# Altium PCB PCB1.PcbDoc
Units mil, origin at the board's own origin, x right, y up, seen from the top; angles counter-clockwise.
Board outline 6000 x 4000 mil, 2 copper layers (Top Layer, Bottom Layer); 50 components, 22 nets, 166 pads, 2 vias.
Unrouted connection lines stored in the file: 14.
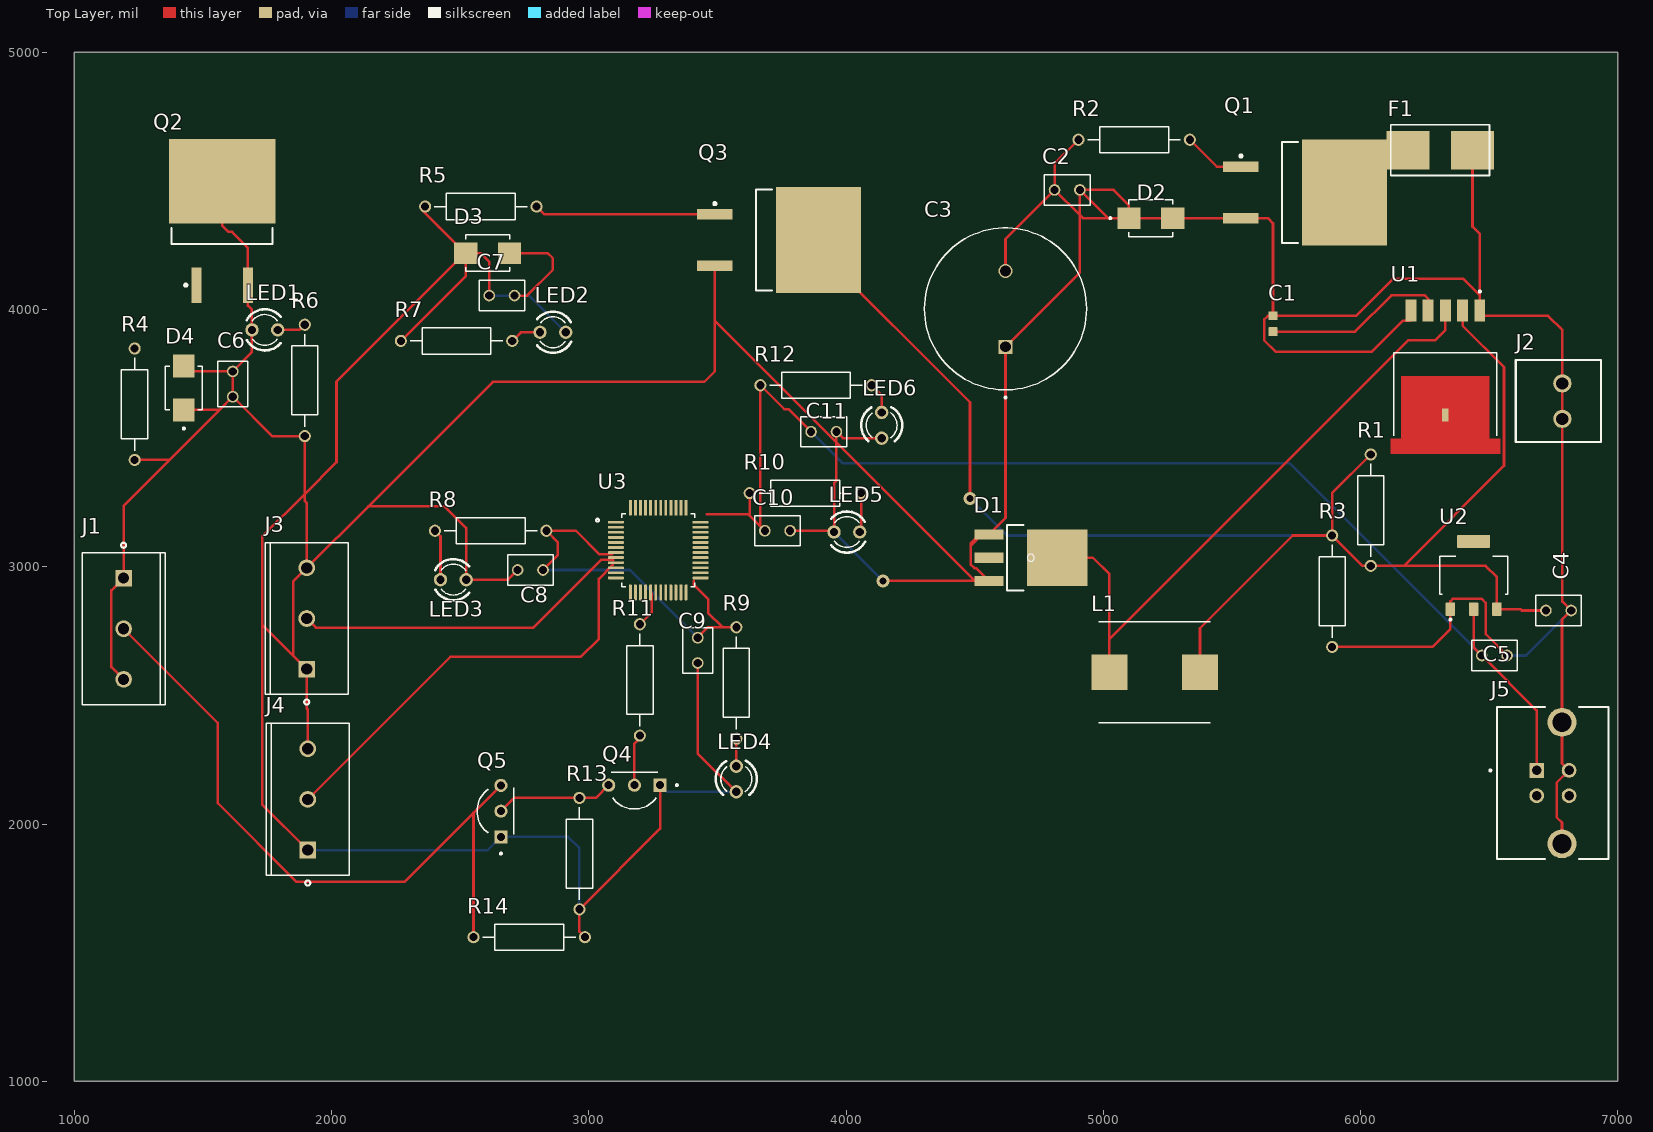
[diagram p0: Top Layer view]
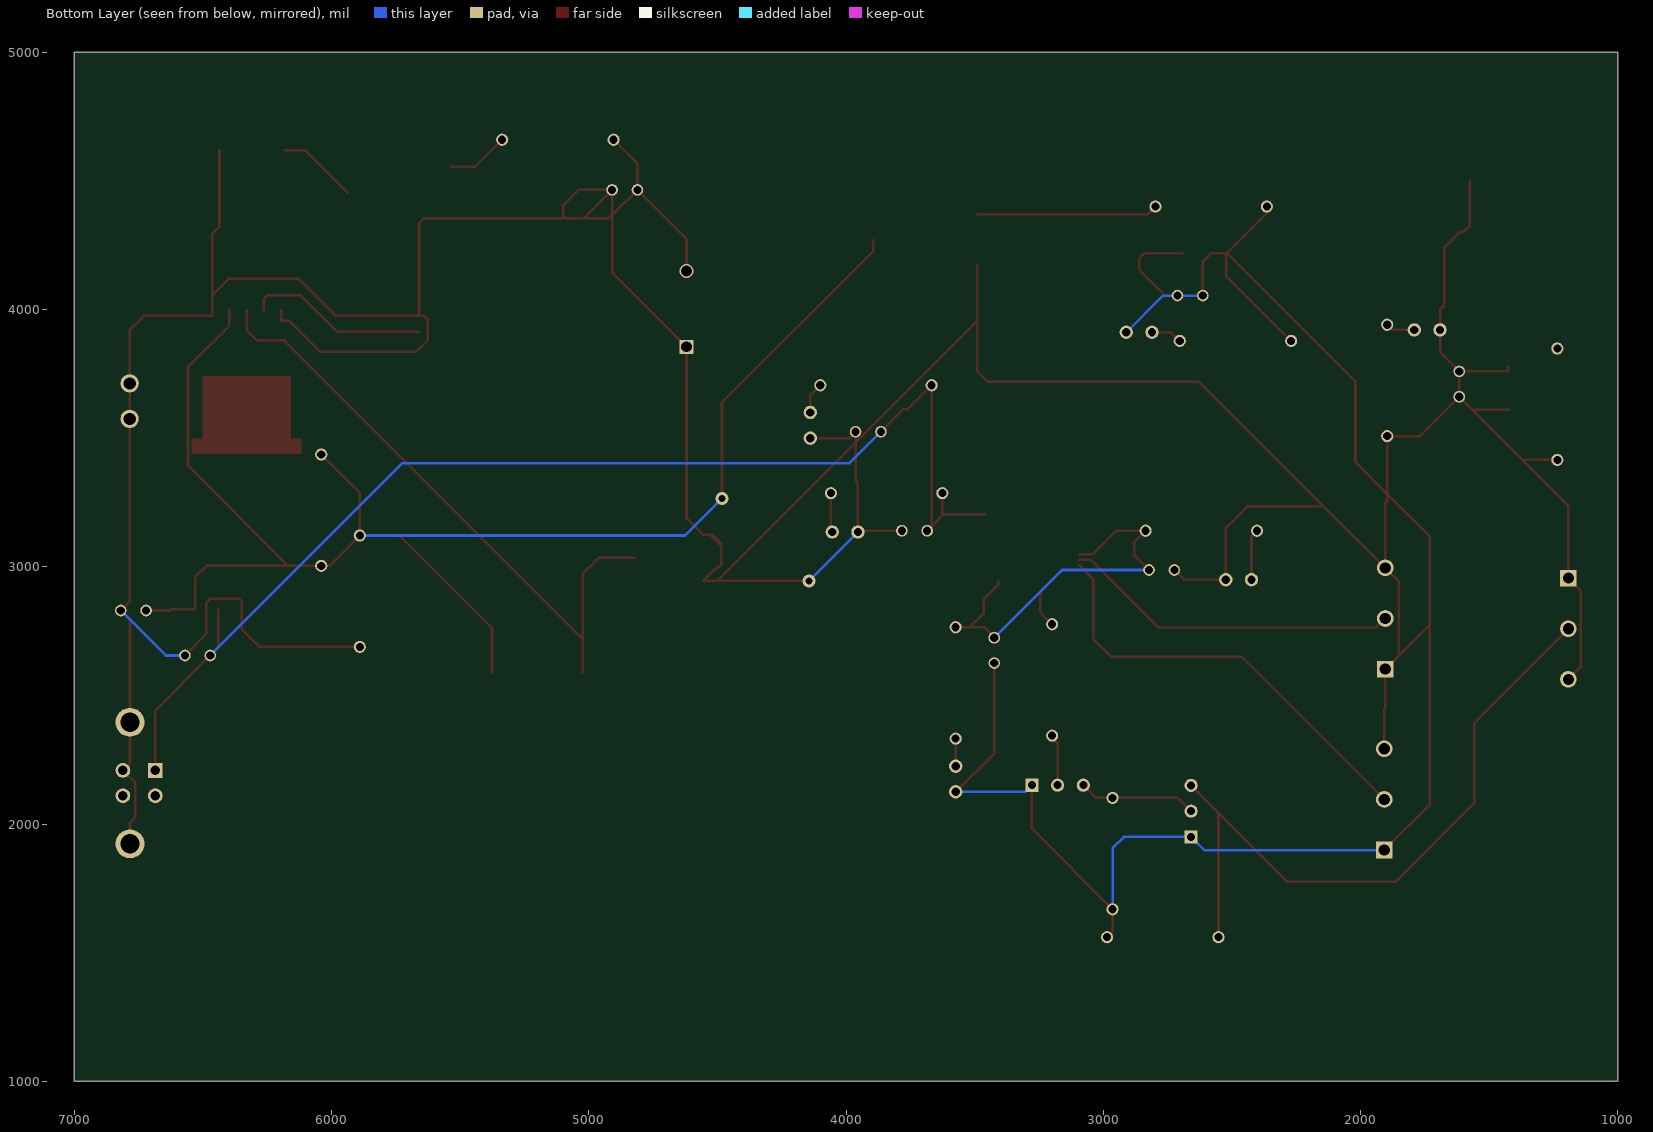
[diagram p1: Bottom Layer view, seen from below]
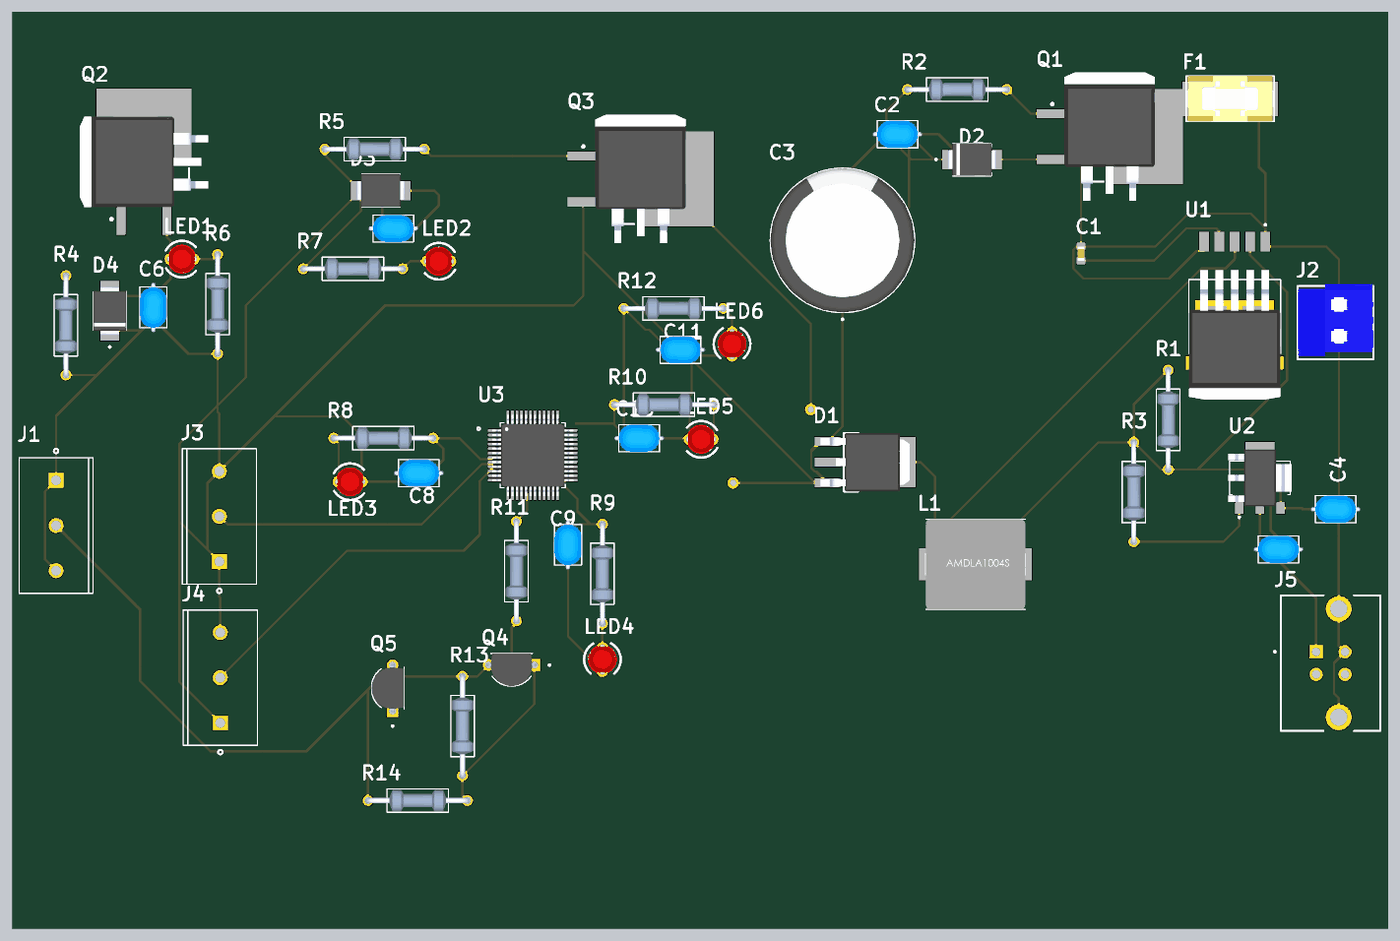
[diagram p2: 3D render of the assembled board from above, using the file's embedded part models]

## Layer stack, top to bottom
Top Solder: solder mask 0.4, Solder Resist, Dk 3.5
Top Layer: signal copper 1.4
Dielectric 1: dielectric 12.6, FR-4, Dk 4.8
Bottom Layer: signal copper 1.4
Bottom Solder: solder mask 0.4, Solder Resist, Dk 3.5

## Board outline
1000,1000 7000,1000 7000,5000 1000,5000

## Design rules (kind name [scope] priority, off if disabled: settings)
Clearance [All] p1: gap=10 ignorepadtopadclearanceinfootprint=FALSE
PolygonConnect [All] p1: connectstyle=Relief reliefconductorwidth=10 reliefentries=4 polygonreliefangle="90 Angle" airgapwidth=10
RoutingVias [All] p1: holewidth=28 width=50 viastyle="Through Hole" minholewidth=28 minwidth=50 maxholewidth=28 maxwidth=50
SolderMaskExpansion [All] p1: expansion=4 istentingtop=FALSE
SupplyNets "Schematic Supply Nets" [InNet('12+')] p1: voltage=0.000
Width [All] p1: maxlimit=10 minlimit=10 preferedwidth=10
30 further rules are at their usual default settings.

## Components (designator, comment, footprint, x,y, rotation, side; value= is the part's Value field where it differs from the comment)
C1 "CL10B105KO8NNNC" CAPC1608X90N 5660,3945 r90 top
C2 "FA14X8R1H104KNU06" CAPRB250W50L450T300H550 4860,4465.02 r0 top
C3 "ECA2AM471B" CAPPRD750W80D1600H2500 4620,4002.38 r90 top
C4 "0.1 uf ceramic" CAPRB250W50L450T300H550 6770,2830 r180 top
C5 "0.1 uf ceramic" CAPRB250W50L450T300H550 6520.79,2655.02 r180 top
C6 "0.1 uf ceramic" CAPRB250W50L450T300H550 1616.06,3710.29 r90 top
C7 "0.1 uf ceramic" CAPRB250W50L450T300H550 2662.2,4054.3 r0 top
C8 "0.1 uf ceramic" CAPRB250W50L450T300H550 2772.78,2987.47 r0 top
C9 "0.1 uf ceramic" CAPRB250W50L450T300H550 3423.57,2674.95 r90 top
C10 "0.1 uf ceramic" CAPRB250W50L450T300H550 3733.57,3139.95 r180 top
C11 "0.1 uf ceramic" CAPRB250W50L450T300H550 3913.57,3524.95 r180 top
D1 "MBRD1045T4G" TO229P990X238-4N 4718.74,3035.01 r0 top
D2 "SMBJ12A" DIOM4336X265N#1 5185,4355.02 r0 top
D3 "SMBJ8.0CA" DIOM4336X265N#2 2607.15,4219.47 r180 top
D4 "SMBJ12A" DIOM4336X265N#1 1425.85,3695.08 r90 top
F1 "0154007.DR" 0154007.DR 6310,4620 r180 top
J1 "282836-3" TE_282836-3 1191.73,2759.04 r270 top
J2 "OSTTF020161" OST_OSTTF020161 6768.96,3643.97 r90 top
J3 "282836-3" TE_282836-3 1903.56,2798.83 r90 top
J4 "282836-3" TE_282836-3 1907.58,2095.57 r90 top
J5 "USBR-B-S-S-O-VT" SAMTEC_USBR-B-S-S-O-VT 6747.99,2159.21 r90 top
L1 "AMDLA1004S-470MT" IND_AMDLA1004S-470MT 5200,2590 r0 top
LED1 "TLLR4400" LED3MM 1740.66,3920.81 r0 top
LED2 "TLLR4400" LED3MM 2860.47,3911.58 r180 top
LED3 "TLLR4400" LED3MM 2473.57,2949.95 r0 top
LED4 "TLLR4400" LED3MM 3573.57,2174.95 r270 top
LED5 "TLLR4400" LED3MM 4003.57,3134.95 r180 top
LED6 "TLLR4400" LED3MM 4138.57,3549.95 r270 top
Q1 "MTB50P03HDLT4G" ONSC-D2PAK-3-418B-04_V 5785,4455 r0 top
Q2 "MTB50P03HDLT4G" ONSC-D2PAK-3-418B-04_V 1575,4345 r90 top
Q3 "MTB50P03HDLT4G" ONSC-D2PAK-3-418B-04_V 3740,4270 r0 top
Q4 "2N3904" TO92254P460H750-3 3177.49,2150.9 r180 top
Q5 "2N3904" TO92254P460H750-3 2658.57,2049.95 r90 top
R1 "14.3" RESAD1100W55L680D260 6040,3220.02 r90 top
R2 "10k" RESAD1100W55L680D260 5120,4660.02 r0 top
R3 "1.5" RESAD1100W55L680D260 5890,2905.02 r90 top
R4 "10k" RESAD1100W55L680D260 1234.61,3632.02 r90 top
R5 "10k" RESAD1100W55L680D260 2580.54,4400.24 r0 top
R6 "330" RESAD1100W55L680D260 1896.07,3724.39 r90 top
R7 "330" RESAD1100W55L680D260 2486.02,3878.12 r0 top
R8 "MFR-25FBF52-10K" RESAD1100W55L680D260 2618.57,3139.95 r180 top
R9 "MFR-25FBF52-10K" RESAD1100W55L680D260 3573.57,2548.41 r270 top
R10 "MFR-25FBF52-10K" RESAD1100W55L680D260 3842.13,3286.11 r0 top
R11 "4.7k" RESAD1100W55L680D260 3198.57,2559.95 r90 top
R12 "MFR-25FBF52-10K" RESAD1100W55L680D260 3883.44,3705.67 r0 top
R13 "4.7k" RESAD1100W55L680D260 2963.57,1884.95 r90 top
R14 "1k" RESAD1100W55L680D260 2768.57,1559.95 r180 top
U1 "XL4015" CONV_XL4015 6330,3590 r270 top
U2 "AMS1117-3.3" SOT229P700X180-4N 6439.84,2966.71 r0 top
U3 "STM32F103C8T6" QFP50P900X900X160-48N 3270,3065 r0 top

## Footprints (in the part's own frame and the unit in brackets; to place one, negate y for a bottom-side part, rotate by r counter-clockwise, add the part's x,y. Pads: shape width x height; smd on the part's side, far side on the other; paste and mask are expansions set on the pad)
0154007.DR [mm]
  rect 4.24x3.81 smd: 1(-3.185,0) 2(3.185,0)
  silkscreen extent -4.87,-2.52 4.87,2.52, body extent -4.86,-2.51 4.86,2.51, height 3.81
CAPC1608X90N [mm]
  rrect25% 0.87x0.93 smd: 1(-0.78,0) 2(0.78,0)
  body extent -0.8,-0.4 0.8,0.4, height 0.9
CAPPRD750W80D1600H2500 [mm]
  round 1.4 hole 1.05: N(3.75,0)
  rect 1.4x1.4 / inner round 1.4 / far side rect 1.4x1.4 hole 1.05: P(-3.75,0)
  silkscreen extent -8.85,-8 8,8, body extent -8,-8 8,8, height 25
CAPRB250W50L450T300H550 [mm]
  round 1.15 hole 0.8: 1(-1.25,0) 2(1.25,0)
  silkscreen extent -2.25,-1.5 2.25,1.5, body extent -2.75,-1.5 2.75,1.5, height 5.5
CONV_XL4015 [mm]
  rect 2.16x1.07 smd: 1(-10.335,3.4) 2(-10.335,1.7) 3(-10.335,0) 4(-10.335,-1.7) 5(-10.335,-3.4)
  rect 1.27x0.635 smd paste-2 mask+0: 3.1(0,0)
  Top Layer region: 3.835,-5.4 2.365,-5.4 2.365,-4.35 -3.835,-4.35 -3.835,4.35 2.365,4.35 2.365,5.4 3.835,5.4
  silkscreen extent -12.3,-5.08 2.05,5.08, body extent -7.17,-5.08 7.17,5.08, height 4.7
DIOM4336X265N#1 [mm]
  rect 2.28x2.12 smd: A(2.165,0) C(-2.165,0)
  silkscreen extent -4.1,-1.81 2.16,1.81, body extent -2.67,-1.81 2.67,1.81, height 2.65
DIOM4336X265N#2 [mm]
  rect 2.28x2.12 smd: 1(-2.165,0) 2(2.165,0)
  silkscreen extent -2.16,-1.81 2.16,1.81, body extent -2.67,-1.81 2.67,1.81, height 2.65
IND_AMDLA1004S-470MT [mm]
  rect 3.55x3.5 smd: 1(-4.475,0) 2(4.475,0)
  silkscreen extent -5.5,-5 5.5,5, body extent -5.57,-5 5.57,5, height 3.8
LED3MM [mil]
  round 52 hole 32: A(-50,0) K(50,0)
  silkscreen extent -71,-80 61,80, body extent -60,-62 60,62, height 240
ONSC-D2PAK-3-418B-04_V [mm]
  rect 3.504x1.016 smd: 1(-6.35,2.54) 3(-6.35,-2.54)
  rect 8.38x10.49 smd: 4(3.9,0)
  silkscreen extent -6.47,-4.99 -0.69,4.99, body extent -5.01,-7.1 5.01,7.1, height 4.57
OST_OSTTF020161 [mm]
  round 1.8 hole 1.2: 1(-1.75,-0.4) 2(1.75,-0.4)
  silkscreen extent -4.05,-4.2 4.05,4.2, body extent -3.75,-4.25 4.25,4.15, height 7
QFP50P900X900X160-48N [mm]
  rrect50% 1.56x0.28 smd: 1(-4.18,2.75) 2(-4.18,2.25) 3(-4.18,1.75) 4(-4.18,1.25) 5(-4.18,0.75) 6(-4.18,0.25) 7(-4.18,-0.25) 8(-4.18,-0.75) 9(-4.18,-1.25) 10(-4.18,-1.75) 11(-4.18,-2.25) 12(-4.18,-2.75) 25(4.18,-2.75) 26(4.18,-2.25) 27(4.18,-1.75) 28(4.18,-1.25) 29(4.18,-0.75) 30(4.18,-0.25) 31(4.18,0.25) 32(4.18,0.75) 33(4.18,1.25) 34(4.18,1.75) 35(4.18,2.25) 36(4.18,2.75)
  rrect50% 0.28x1.56 smd: 13(-2.75,-4.18) 14(-2.25,-4.18) 15(-1.75,-4.18) 16(-1.25,-4.18) 17(-0.75,-4.18) 18(-0.25,-4.18) 19(0.25,-4.18) 20(0.75,-4.18) 21(1.25,-4.18) 22(1.75,-4.18) 23(2.25,-4.18) 24(2.75,-4.18) 37(2.75,4.18) 38(2.25,4.18) 39(1.75,4.18) 40(1.25,4.18) 41(0.75,4.18) 42(0.25,4.18) 43(-0.25,4.18) 44(-0.75,4.18) 45(-1.25,4.18) 46(-1.75,4.18) 47(-2.25,4.18) 48(-2.75,4.18)
  silkscreen extent -6.15,-3.6 3.6,3.6, body extent -4.5,-4.5 4.5,4.5, height 1.6
RESAD1100W55L680D260 [mm]
  round 1.2 hole 0.8: 1(-5.5,0) 2(5.5,0)
  silkscreen extent -4.58,-1.3 4.58,1.3, body extent -5.77,-1.2 5.77,1.2, height 2.4
SAMTEC_USBR-B-S-S-O-VT [mm]
  rect 1.458x1.458 hole 0.95: 01(1.25,1.6)
  round 1.458 hole 0.95: 02(-1.25,1.6) 03(-1.25,-1.6) 04(1.25,-1.6)
  round 2.85 hole 1.9: S1(6,-0.9) S2(-6,-0.9)
  silkscreen extent -7.5,-5.5 7.5,6.28
SOT229P700X180-4N [mm]
  rrect15% 0.93x1.31 smd: 1(-2.29,-3.345) 2(0,-3.345) 3(2.29,-3.345)
  rrect15% 3.24x1.31 smd: 4(0,3.345)
  silkscreen extent -3.36,-4.47 3.36,1.86, body extent -3.5,-3.15 3.5,3.15, height 1.8
TE_282836-3 [mm]
  rect 1.65x1.65 hole 1.1: 1(-5,0)
  round 1.65 hole 1.1: 2(0,0) 3(5,0)
  silkscreen extent -8.5,-4.1 7.5,4.1
TO229P990X238-4N [mm]
  rect 2.85x1 smd: 1(-4.15,2.29) 2(-4.15,0) 3(-4.15,-2.29)
  rect 5.95x5.55 smd: 4(2.6,0)
  silkscreen extent -2.35,-3.25 0.35,3.25, body extent -4.95,-3.25 4.95,3.25, height 2.39
TO92254P460H750-3 [mm]
  rect 1.298x1.298 / inner round 1.298 / far side rect 1.298x1.298 hole 0.79: 1(-2.54,0)
  round 1.298 hole 0.79: 2(0,0) 3(2.54,0)
  silkscreen extent -4.29,-1.27 2.3,2.33, body extent -2.74,-1.27 2.74,2.33, height 8.09

## Part data
C1: "1 µF Â±10% 16V Ceramic Capacitor X7R 0603 (1608 Metric)", Package="SMD-2 Samsung", Check_prices=https://www.snapeda.com/parts/CL10B105KO8NNNC/Samsung/view-part/?ref=eda, MF="Samsung Electro-Mechanics", MP=CL10B105KO8NNNC, SnapEDA_Link=https://www.snapeda.com/parts/CL10B105KO8NNNC/Samsung/view-part/?ref=snap
C2: "0.1 ÂµF Â±10% 50V Ceramic Capacitor X8R Radial", Package="Radial TDK", Check_prices=https://www.snapeda.com/parts/FA14X8R1H104KNU06/TDK/view-part/?ref=eda, MF=TDK, MP=FA14X8R1H104KNU06, SnapEDA_Link=https://www.snapeda.com/parts/FA14X8R1H104KNU06/TDK/view-part/?ref=snap
C3: "CAP ALUM 470UF 20% 100V RADIAL", Package="RADIAL-2 Panasonic", Availability="In Stock", Check_prices=https://www.snapeda.com/parts/ECA2AM471B/Panasonic/view-part/?ref=eda, MF=Panasonic, MP=ECA2AM471B, Price=None, Purchase-URL=https://pricing.snapeda.com/search/part/ECA2AM471B/?ref=eda, SnapEDA_Link=https://www.snapeda.com/parts/ECA2AM471B/Panasonic/view-part/?ref=snap
C4 C5 C6 C7 C8 C9 C10 C11: library part FA14X8R1H104KNU06, "0.1 ÂµF Â±10% 50V Ceramic Capacitor X8R Radial", Package="Radial TDK", Check_prices=https://www.snapeda.com/parts/FA14X8R1H104KNU06/TDK/view-part/?ref=eda, MF=TDK, MP=FA14X8R1H104KNU06, SnapEDA_Link=https://www.snapeda.com/parts/FA14X8R1H104KNU06/TDK/view-part/?ref=snap
D1: "Diode Schottky 45 V 10A Surface Mount DPAK", Package="DPAK-3 ON Semiconductor", Check_prices=https://www.snapeda.com/parts/MBRD1045T4G/Onsemi/view-part/?ref=eda, MF="ON Semiconductor", MP=MBRD1045T4G, SnapEDA_Link=https://www.snapeda.com/parts/MBRD1045T4G/Onsemi/view-part/?ref=snap
D2 D4: "600W, 14V, 5%, Unidirectional, TVS", Package="SMD-2 Taiwan Semiconductor", Check_prices=https://www.snapeda.com/parts/SMBJ12A/taiwan/view-part/?ref=eda, MF="Taiwan Semiconductor Corporation", MP=SMBJ12A, SnapEDA_Link=https://www.snapeda.com/parts/SMBJ12A/taiwan/view-part/?ref=snap
D3: "600W, 9.4V, 5%, Bidirectional, TVS", Package="SMB Taiwan Semiconductor", Check_prices=https://www.snapeda.com/parts/SMBJ8.0CA/taiwan/view-part/?ref=eda, MF="Taiwan Semiconductor", MP=SMBJ8.0CA, SnapEDA_Link=https://www.snapeda.com/parts/SMBJ8.0CA/taiwan/view-part/?ref=snap
F1: "7 A 125 V AC 125 V DC Fuse Board Mount (Cartridge Style Excluded) Requires Holder, Surface Mount 2-SMD, Square End Block with Holder", Package="SMD-2 Littelfuse", Availability="In Stock", Check_prices=https://www.snapeda.com/parts/0154007.DR/Littelfuse+Inc./view-part/?ref=eda, MF="Littelfuse Inc.", MP=0154007.DR, Price=None, Purchase-URL=https://pricing.snapeda.com/search?q=0154007.DR&ref=eda, SnapEDA_Link=https://www.snapeda.com/parts/0154007.DR/Littelfuse+Inc./view-part/?ref=snap
J1 J3 J4: "TERM BLOCK 3POS SIDE ENTRY 5MM", Package=None, Availability=Unavailable, MP=282836-3, Price=None
J2: "2 Position Wire to Board Terminal Block Vertical with Board 0.138 (3.50mm) Through Hole", Package=None, Check_prices=https://www.snapeda.com/parts/OSTTF020161/ON/view-part/?ref=eda, MF="On Shore", MP=OSTTF020161, SnapEDA_Link=https://www.snapeda.com/parts/OSTTF020161/ON/view-part/?ref=snap
J5: Package=None, Availability=Unavailable, MF=Samtec, MP=USBR-B-S-S-O-VT, Price=None
L1: "FIXED IND 47UH 3.5A 143MOHM SMD", Package=Package, Availability="In Stock", Check_prices=https://www.snapeda.com/parts/AMDLA1004S-470MT/Abracon+LLC/view-part/?ref=eda, MF="Abracon LLC", MP=AMDLA1004S-470MT, Price=None, Purchase-URL=https://pricing.snapeda.com/search/part/AMDLA1004S-470MT/?ref=eda, SnapEDA_Link=https://www.snapeda.com/parts/AMDLA1004S-470MT/Abracon+LLC/view-part/?ref=snap
LED1 LED2 LED3 LED4 LED5 LED6: "Red 619nm LED Indication - Discrete 1.9V Radial", Package=None, Check_prices=https://www.snapeda.com/parts/TLLR4400/Vishay+Semiconductor+Opto+Division/view-part/?ref=eda, MF=Vishay, MP=TLLR4400, SnapEDA_Link=https://www.snapeda.com/parts/TLLR4400/Vishay+Semiconductor+Opto+Division/view-part/?ref=snap
Q1 Q2 Q3: "P-Channel 30 V 50A (Tc) 2.5W (Ta), 125W (Tc) Surface Mount DÂ²PAK", Package="D2PAK ON Semiconductor", Availability="In Stock", Check_prices=https://www.snapeda.com/parts/MTB50P03HDLT4G/Onsemi/view-part/?ref=eda, MF="ON Semiconductor", MP=MTB50P03HDLT4G, Price=None, Purchase-URL=https://pricing.snapeda.com/search/part/MTB50P03HDLT4G/?ref=eda, SnapEDA_Link=https://www.snapeda.com/parts/MTB50P03HDLT4G/Onsemi/view-part/?ref=snap
Q4 Q5: "BJT, TO-92, 40V, 200mA, NPN, 0.625W, 150Â°C", Package="TO-92 Diotec", Check_prices=https://www.snapeda.com/parts/2N3904/Diotec/view-part/?ref=eda, MF="Diotec Semiconductor", MP=2N3904, SnapEDA_Link=https://www.snapeda.com/parts/2N3904/Diotec/view-part/?ref=snap
R1 R2 R3 R4 R5 R6 R7 R11 R13 R14: library part MFR-25FBF52-10K, "10.2 kOhms Â±1% 0.25W, 1/4W Through Hole Resistor Axial - Metal Film", Package="RADIAL-2 YAGEO", Check_prices=https://www.snapeda.com/parts/MFR-25FBF52-10K/Yageo/view-part/?ref=eda, MF=Yageo, MP=MFR-25FBF52-10K, SnapEDA_Link=https://www.snapeda.com/parts/MFR-25FBF52-10K/Yageo/view-part/?ref=snap
R8 R9 R10 R12: "10.2 kOhms Â±1% 0.25W, 1/4W Through Hole Resistor Axial - Metal Film", Package="RADIAL-2 YAGEO", Check_prices=https://www.snapeda.com/parts/MFR-25FBF52-10K/Yageo/view-part/?ref=eda, MF=Yageo, MP=MFR-25FBF52-10K, SnapEDA_Link=https://www.snapeda.com/parts/MFR-25FBF52-10K/Yageo/view-part/?ref=snap
U1: "5A 180KHz 36V Buck DC to DC Converter", Package=None, Check_prices=https://www.snapeda.com/parts/XL4015/XLSEMI/view-part/?ref=eda, MF=XLSEMI, MP=XL4015, SnapEDA_Link=https://www.snapeda.com/parts/XL4015/XLSEMI/view-part/?ref=snap
U2: "Linear Voltage Regulator IC Positive Fixed 1 Output 1A SOT-223-3L", Package="SOT-223-3L UMW", Check_prices=https://www.snapeda.com/parts/AMS1117-3.3/UMW/view-part/?ref=eda, MF=UMW, MP=AMS1117-3.3, SnapEDA_Link=https://www.snapeda.com/parts/AMS1117-3.3/UMW/view-part/?ref=snap
U3: "ARM® Cortex®-M3 STM32F1 Microcontroller IC 32-Bit 72MHz 64KB (64K x 8) FLASH 48-LQFP (7x7)", Package="LQFP-48 STMicroelectronics", Check_prices=https://www.snapeda.com/parts/STM32F103C8T6/STMicroelectronics/view-part/?ref=eda, MF=STMicroelectronics, MP=STM32F103C8T6, SnapEDA_Link=https://www.snapeda.com/parts/STM32F103C8T6/STMicroelectronics/view-part/?ref=snap

## Via types
v1: diameter 50, hole 28, Top Layer to Bottom Layer, 2 vias

## Nets (pads, with @x,y where several pads share a name; then routed paths per layer and width w, separated by ;. In a path a pad name is that pad's centre, name@x,y a point inside that pad or via, vN(x,y) a via of type N, cw(c..) or ccw(c..) an arc to the next point about the centre after c; other vN are vias at no path point)
3.3+: C5.2 C8.2 C9.2 C10.2 C11.2 J5.01 R8.1 R9.1 R10.1 R12.1 U2.2 U3.9 U3.24 U3.36 U3.48 | length 6449.6
  Top Layer w10: C8.2 2880,3045.47 2880,3095.05 R8.1 2949.69,3139.95 3041.22,3048.42 3092.04,3048.42 ; 3408.57,2944.95 3408.57,2929.95 3464.36,2874.16 3464.36,2820.59 3520,2764.95 ; C9.2 3464.36,2764.95 3520,2764.95 ; 3458.57,3204 3620.3,3204 3625.59,3198.71 ; R9.1 3520,2764.95 ; R10.1 3625.59,3198.71 ; C10.2 3666.9,3157.4 ; C11.2 3776.7,3612.6 3759.97,3612.6 R12.1 3666.9,3157.4 ; U2.2 6439.84,2686.75 C5.2 6685,2441.59 J5.01 ; 3625.59,3198.71 3666.9,3157.4
  Bottom Layer w10: C8.2 3160.26,2987.47 C9.2 ; C11.2 3986.31,3403 5723.59,3403 C5.2
8.4+: C4.2 L1.2 Q3.4 R1.1 R1.2 R3.2 U1.2 U2.3 | length 6173.7
  Top Layer w10: Q3.4 3893.54,4228 4482,3639.54 v1(4482,3265) ; L1.2 5376.18,2761 5736.74,3121.55 R3.2 ; R1.2 5890,3286.55 R3.2 ; U1.2 6396.93,3937 6558,3775.93 6558,3393 6168.48,3003.48 ; C4.2 6627.02,2830 6622,2835.02 U2.3 6530,2960 6486.52,3003.48 6168.48,3003.48 ; R3.2 6008.07,3003.48 R1.1 6168.48,3003.48
  Bottom Layer w10: v1(4482,3265) 4625.45,3121.55 R3.2
12+: C1.2 C2.1 C2.2 C3.N C3.P C4.1 C5.1 C6.1 C6.2 C7.1 C7.2 C8.1 C9.1 C10.1 C11.1 D1.1 D1.3 D2.A D2.C D3.1 D3.2 D4.A D4.C F1.1 J1.1 J1.3 J2.1 J2.2 J3.1 J3.3 J4.1 J4.3 J5.04 J5.S1 J5.S2 LED1.A LED2.A LED3.K LED4.K LED5.K LED6.K Q1.3 Q2.3 Q2.4 Q3.3 Q4.1 Q5.1 R2.1 R3.1 R4.1 R5.1 R6.1 R7.1 R13.1 R14.1 U1.1 U1.5 U2.1 U3.8 U3.23 U3.35 U3.47 | length 28061.6
  Top Layer w10: J1.3 1144,2609.92 1144,2908.16 J1.1 1191.73,3236.75 1370.47,3415.49 ; R4.1 1370.47,3415.49 ; D4.C 1564.83,3609.85 ; D4.A 1425.85,3759.5 C6.2 ; Q2.4 1575,4327 1600,4302 1613,4302 1675,4240 Q2.3 1675,4015.66 1690.66,4000 LED1.A 1690.66,3834.1 C6.2 ; J4.1 1730.13,2076.17 1730.13,2775.41 ; J4.3 1907.58,2445 1903.56,2449.02 J3.1 1852,2653.55 ; R7.1 2521.91,4130.54 D3.2 ; R5.1 2351,4387.24 2417.82,4320.41 D3.2@2518.76,4219.47 ; C7.1 2612.99,4186.48 2580,4219.47 D3.2 ; D3.1 2840,4219.47 2860,4199.47 2860,4154.52 2759.78,4054.3 C7.2 ; C8.1 2686.05,2949.95 LED3.K 2523.57,3151.43 2440,3235 2142.88,3235 ; R14.1 2963.57,1581.48 R13.1 3277.49,1982.34 Q4.1 ; C9.1 3423.57,2274.95 LED4.K ; Q3.3 3490,3955.86 ; C10.1 3948.57,3139.95 LED5.K 3953.57,3325 3962.78,3334.21 3962.78,3483.08 ; LED6.K 3987.78,3499.95 C11.1 3962.78,3483.08 ; v1(4143.67,2944.85) D1.3@4501.01,2944.85 ; C3.N 4620,4274.23 C2.1 ; R2.1 4810.79,4567.34 C2.1 ; R3.1 6280,2688.48 6349.69,2758.17 U2.1 6349.69,2865.69 6360,2876 6471,2876 6487,2860 6487,2738.02 C5.1 ; U1.5 6196.14,3956 6164,3956 6044,3836 5670,3836 5626,3880 5626,3961.71 5640,3975.71 C1.2 ; F1.1 6435.39,4322.46 6463.86,4294 6463.86,4055.14 ; J5.S2 6783.43,2005.57 6763,2026 6763,2160.44 J5.04 6783.43,2235.98 J5.S1 6783.43,2794.21 C4.1 6784.71,2864.5 J2.1 J2.2 6784.71,3920 6729.71,3975 6463.86,3975 U1.1 6463.86,4055.14 ; 1370.47,3415.49 1564.83,3609.85 ; 1564.83,3609.85 C6.1 ; C6.1 1769.27,3507.86 R6.1 1896.07,3283.59 ; C6.1 C6.2 ; 1730.13,2775.41 1852,2653.55 ; 1730.13,2775.41 1730.13,3117.65 1896.07,3283.59 ; 1852,2653.55 1852,2944.12 J3.3 ; 1896.07,3283.59 1896.07,3255.49 1903.56,3248 J3.3 ; 1896.07,3283.59 2019.22,3406.73 2019.22,3719.93 D3.2@2518.76,4219.47 ; J3.3 2142.88,3235 ; 2142.88,3235 2626.88,3719 3449,3719 3490,3760 3490,3955.86 ; D3.2@2518.76,4219.47 D3.2 ; 3490,3955.86 3962.78,3483.08 ; 3962.78,3483.08 D1.3@4501.01,2944.85 ; 4484.25,3080 4484.25,3090.48 4518.94,3125.17 D1.1@4529.42,3125.17 ; 4484.25,3080 4484.25,3009.11 4499.04,2994.32 4505.88,2994.32 D1.3 D1.3@4501.01,2944.85 ; 4484.25,3080 D1.1@4529.42,3125.17 ; D1.1@4529.42,3125.17 D1.1 4620,3189.81 C3.P 4909.21,4143.96 4909.21,4366.59 ; C2.1 4909.21,4366.59 ; 4909.21,4366.59 4920.79,4355.02 5019.21,4355.02 ; 4909.21,4366.59 C2.2 ; C2.2 5019.21,4355.02 ; C2.2 5040,4465.02 5099.76,4405.25 D2.C ; 5019.21,4355.02 D2.C ; D2.C D2.A 5403.02,4355 Q1.3 5640,4355 5660,4335 C1.2 ; C1.2 5983,3975.71 6126.29,4119 6400,4119 6463.86,4055.14
  Bottom Layer w10: J4.1 2607.34,1898.72 Q5.1 2920,1949.95 2963.57,1906.38 R13.1 ; C7.1 C7.2 2767.75,4054.3 LED2.A ; Q4.1 3303.44,2124.95 LED4.K ; LED5.K v1(4143.67,2944.85) ; C5.1 6644.23,2655.02 C4.1
"Control piston": J1.2 Q5.3 R14.2 | length 2696.2
  Top Layer w10: J1.2 1557.71,2393.07 1557.71,2080.92 1863.83,1774.8 2283.43,1774.8 2552.04,2043.41 ; R14.2 2552.04,2043.41 ; Q5.3 2552.04,2043.41
Control_S1: J3.2 U3.10 | length 1314.5
  Top Layer w10: J3.2 1938.79,2763.61 2784.69,2763.61 3047.92,3026.84 3093.3,3026.84 3094.09,3026.05
Control_S2: J4.2 U3.11 | length 1698.3
  Top Layer w10: J4.2 2461.51,2649.5 2968.76,2649.5 3039.26,2720 3039.26,2953.11 3092.2,3006.05
D+: J5.03 U3.34
D-: J5.02 U3.37
NetC1_1: C1.1 U1.4 | length 711.8
  Top Layer w10: C1.1 5979.29,3914.29 6120,4055 6250,4055 6263.07,4041.93 U1.4
NetD1_4: D1.4 L1.1 U1.3 | length 2491
  Top Layer w10: D1.4 4960,3035.01 5023.82,2971.19 5023.82,2718.82 ; L1.1 5023.82,2718.82 ; U1.3 6330,3920 6290,3880 6185,3880 5023.82,2718.82
NetF1_2: F1.2 Q1.4 | length 314.4
  Top Layer w10: Q1.4 6103.54,4620 F1.2
NetLED1_K: LED1.K R6.2 | length 113.7
  Top Layer w10: LED1.K 1875.95,3920.81 R6.2
NetLED2_K: LED2.K R7.2 | length 121.8
  Top Layer w10: R7.2 2736.02,3911.58 LED2.K
NetLED3_A: LED3.A R8.2 | length 198.9
  Top Layer w10: R8.2 2423.57,3118.41 LED3.A
NetLED4_A: LED4.A R9.2 | length 106.9
  Top Layer w10: LED4.A R9.2
NetLED5_A: LED5.A R10.2 | length 153.3
  Top Layer w10: LED5.A 4058.66,3140.04 R10.2
NetLED6_A: LED6.A R12.2 | length 121.7
  Top Layer w10: R12.2 4138.57,3667.08 LED6.A
NetQ1_1: Q1.1 R2.2 | length 242
  Top Layer w10: R2.2 5441.55,4555 Q1.1
NetQ3_1: Q3.1 R5.2 | length 705.5
  Top Layer w10: R5.2 2827.31,4370 Q3.1
NetQ4_2: Q4.2 R11.1 | length 201.2
  Top Layer w10: Q4.2 3177.49,2312.26 3198.57,2333.34 R11.1
NetQ4_3: Q4.3 Q5.2 R13.2 | length 460.7
  Top Layer w10: Q5.2 2710.11,2101.48 R13.2 3028.08,2101.48 Q4.3
NetR11_2: R11.2 U3.16 | length 137.7
  Top Layer w10: R11.2 3244.79,2822.7 3244.79,2895.04
pads on no net: D1.2 Q2.1 R4.2 U1.3.1 U2.4 U3.1 U3.2 U3.3 U3.4 U3.5 U3.6 U3.7 U3.12 U3.13 U3.14 U3.15 U3.17 U3.18 U3.19 U3.20 U3.21 U3.22 U3.25 U3.26 U3.27 U3.28 U3.29 U3.30 U3.31 U3.32 U3.33 U3.38 U3.39 U3.40 U3.41 U3.42 U3.43 U3.44 U3.45 U3.46